# Altium PCB TriF3FCPDB.PcbDoc (part 2 of 2)
Units mm, origin at the board's own origin, x right, y up, seen from the top; angles counter-clockwise.
Board outline 130.11 x 100.1 mm, 2 copper layers (Top Layer, Bottom Layer); 86 components, 62 nets, 310 pads, 526 vias.
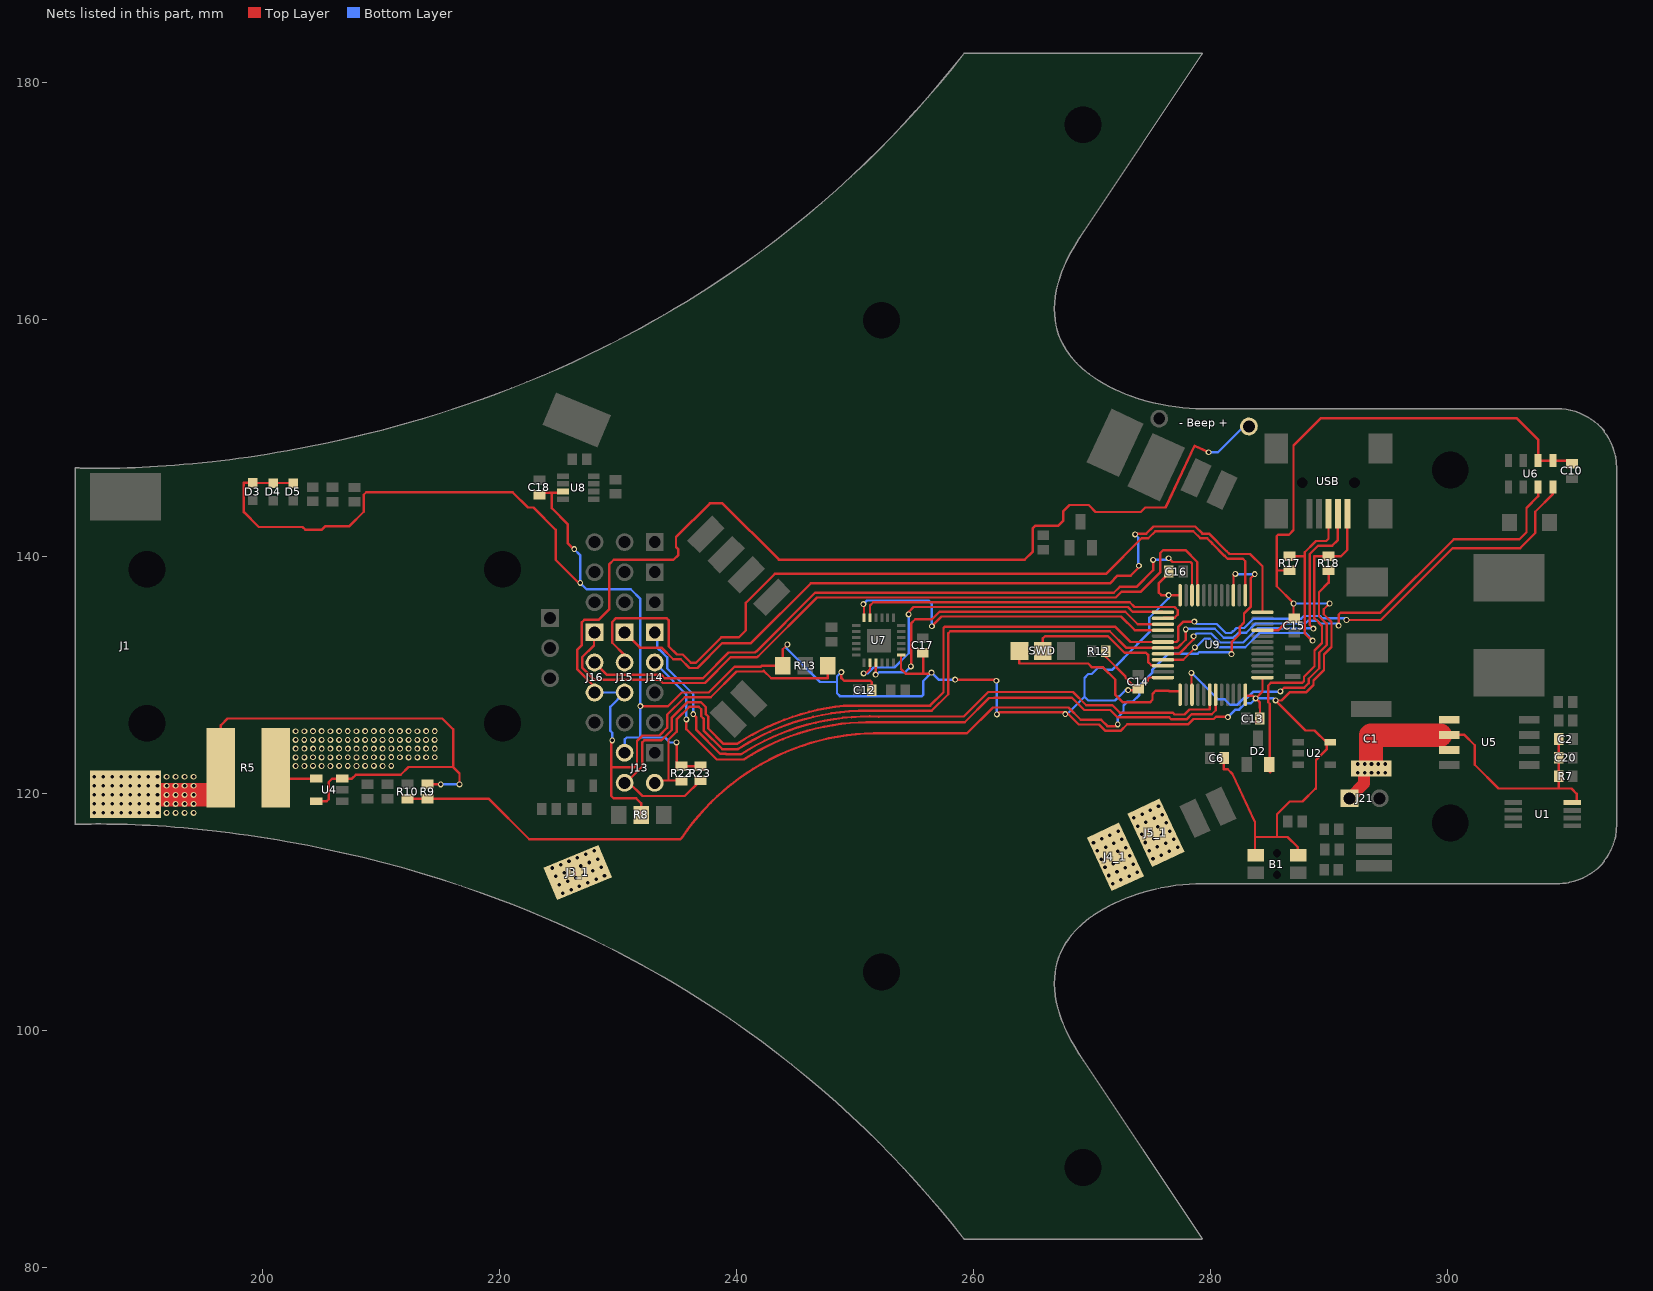
[diagram p2: the nets of this part, all layers, seen from the top]

## Via types
v1: diameter 0.5, hole 0.3, Top Layer to Bottom Layer, tented both sides, 526 vias

## Nets (pads, with @x,y where several pads share a name; then routed paths per layer and width w, separated by ;. In a path a pad name is that pad's centre, name@x,y a point inside that pad or via, vN(x,y) a via of type N, cw(c..) or ccw(c..) an arc to the next point about the centre after c; other vN are vias at no path point) (continued)
SCLK/PA9: J13.4 R23.2 U6.8 U9.30 | length 108.4
  Top Layer w0.2: J13.4@230.561,120.905 230.681,120.905 232.051,122.275 232.051,124.319 232.227,124.495 233.662,124.495 234.551,125.384 234.551,126.413 235.856,127.718 236.987,127.718 237.421,127.284 237.421,126.696 237.624,126.493 237.624,125.49 238.919,124.195 240.051,124.195 ; J13.4@230.871,120.982 232.061,119.792 235.634,119.792 235.637,119.789 R23.2@236.958,121.11 ; 240.051,124.201 cw(c251.247,107.067) 249.076,127.419 ; 249.036,127.423 256.345,127.423 257.474,128.552 257.474,133.979 257.586,134.091 271.944,134.091 273.244,132.791 U9.30@275.995,132.791 277.147,132.791 277.277,132.922 277.277,134.061 277.724,134.508 v1(278.651,134.508) ; v1@291.424,134.686 v1@291.486,134.748 ; v1@291.493,134.755 v1@291.486,134.748 ; U6.8@308.906,145.891 308.906,145.278 307.417,143.789 307.417,141.985 306.146,140.714 300.449,140.714 294.382,134.647 v1(291.486,134.647) v1@291.486,134.748
  Bottom Layer w0.2: v1(278.651,134.508) 278.849,134.309 280.536,134.309 281.293,133.552 281.749,133.552 281.899,133.702 281.941,133.702 282.209,133.97 282.861,133.97 283.639,134.748 287.652,134.748 287.889,134.986 289.238,134.986 289.443,134.78 291.353,134.78 v1(291.486,134.647)
SDA/PA10: J13.3 R22.1 U6.7 U9.31 | length 100
  Top Layer w0.2: J13.3@233.469,120.905 J13.3@233.101,120.905 233.295,121.099 234.303,121.099 ; R22.1@235.362,121.099 234.303,121.099 ; 240.133,123.749 cw(c251.062,106.999) 251.844,126.983 256.471,126.983 257.874,128.386 257.874,133.521 258.044,133.691 271.51,133.691 272.91,132.291 U9.31@275.995,132.291 277.234,132.291 277.92,132.978 v1(277.92,133.854) ; 240.149,123.768 240.131,123.751 238.798,123.751 237.224,125.324 237.224,126.327 237.021,126.53 237.021,127.112 236.815,127.318 236.021,127.318 234.951,126.247 234.951,125.219 234.268,124.535 234.268,121.135 234.303,121.099 ; v1(290.823,134.179) 290.823,135.092 291.003,135.272 294.352,135.272 300.533,141.453 306.069,141.453 306.676,142.06 306.676,144.11 307.656,145.09 U6.7@307.656,145.891
  Bottom Layer w0.2: v1(277.92,133.854) 277.976,133.909 280.371,133.909 281.127,133.152 281.914,133.152 282.064,133.302 282.106,133.302 282.374,133.57 283.027,133.57 283.805,134.348 288.002,134.348 288.239,134.586 289.031,134.586 289.269,134.348 290.654,134.348 v1(290.823,134.179)
SPI2_MISO/PB14: U7.9 U9.27 | length 30
  Top Layer w0.2: v1(251.751,130.034) 251.751,131.019 U7.9@251.765,131.033 ; v1@254.764,130.725 254.764,134.396 255.086,134.718 255.542,134.718 255.566,134.694 255.581,134.709 256.507,134.709 257.139,135.341 272.816,135.341 273.866,134.291 U9.27@275.995,134.291
  Bottom Layer w0.2: v1(251.751,130.034) 251.849,130.034 252.052,130.237 254.235,130.237 v1(254.723,130.725)
SPI2_MOSI/PB15: U7.24 U9.28 | length 29.1
  Top Layer w0.2: v1(250.708,135.991) 250.765,135.934 U7.24@250.765,134.833 ; 256.674,134.31 257.305,134.941 272.461,134.941 273.611,133.791 U9.28@275.995,133.791
  Bottom Layer w0.2: v1(250.708,135.991) 251.009,136.292 256.2,136.292 256.486,136.007 v1(256.486,134.123)
SPI2_NSS/PB12: U7.8 U9.25 | length 30.9
  Top Layer w0.2: v1@250.671,130.09 250.862,130.09 251.265,130.493 U7.8@251.265,131.033 ; v1@254.544,135.122 254.544,135.334 254.951,135.741 273.033,135.741 273.433,135.341 275.945,135.341 U9.25@275.995,135.291
  Bottom Layer w0.2: v1(250.735,130.136) 251.075,130.136 251.577,130.637 253.338,130.637 254.544,131.843 254.544,134.944 v1@254.549,134.948
  other v1: 254.534,135.122
SPI2_SCK/PB13: U7.23 U9.26 | length 29.2
  Top Layer w0.2: U7.23@251.265,134.833 251.265,135.862 251.544,136.141 273.199,136.141 273.599,135.741 276.981,135.741 277.245,135.477 277.245,135.105 276.981,134.841 276.045,134.841 U9.26@275.995,134.791
SWDCLK/PA14: SWD.1 U9.37 | length 17.5
  Top Layer w0.2: SWD.1@263.877,132.062 263.877,130.971 269.686,130.971 270.008,130.649 270.928,130.649 271.979,129.598 271.979,128.328 ; 272.025,128.281 271.979,128.328 ; U9.37@277.371,128.623 277.356,128.639 276.536,128.639 276.503,128.672 275.376,128.672 275.11,128.407 275.11,127.911 274.891,127.692 272.614,127.692 271.979,128.328
SWDIO/PA13: SWD.2 U9.34 | length 12.7
  Top Layer w0.2: SWD.2@265.842,132.037 265.842,133.073 266.048,133.279 271.356,133.279 272.744,131.891 274.556,131.891 274.745,131.702 274.745,131.105 275.009,130.841 275.945,130.841 U9.34@275.995,130.791 ; SWD.2@266.298,132.014 SWD.2@266.34,132.014
UART1_RX/SBUSINPUT/PB7: J14.2 U9.43 | length 57
  Top Layer w0.2: v1(235.767,126.257) 235.767,125.436 238.33,122.873 240.646,122.873 ; 240.675,122.898 cw(c251.157,106.854) 251.041,126.018 cw(c251.157,106.854) 251.157,126.018 259.262,126.018 261.309,128.065 262.03,128.065 262.053,128.088 ; 250.928,126.018 cw(c250.928,107.684) 251.272,126.015 ; 261.746,128.088 262.053,128.088 ; U9.43@280.445,128.341 280.445,127.025 280.111,126.691 278.403,126.691 277.974,126.261 276.688,126.261 276.522,126.427 272.981,126.427 272.182,126.427 272.175,126.427 271.553,127.049 269.359,127.049 268.32,128.088 262.053,128.088
  Bottom Layer w0.2: J14.2@233.101,131.065 234.683,129.483 234.668,129.468 235.767,128.369 v1(235.767,126.257)
UART1_TX/PB6: J14.1 U9.42 | length 57.7
  Top Layer w0.2: v1(236.351,126.701) 236.621,126.432 236.621,125.362 238.632,123.351 239.103,123.351 239.147,123.306 240.377,123.306 240.359,123.324 ; 240.373,123.313 cw(c251.223,106.513) 252.006,126.497 ; 252.006,126.503 259.181,126.503 261.249,128.571 268.402,128.571 269.525,127.449 271.726,127.449 272.348,126.827 276.821,126.827 276.975,126.674 277.819,126.674 278.236,127.091 279.945,127.091 U9.42@279.945,128.341 U9.42@279.895,128.291
  Bottom Layer w0.2: J14.1@233.101,133.605 233.33,133.376 233.33,132.287 233.502,132.115 233.536,132.115 234.151,131.5 234.151,130.581 236.351,128.38 v1(236.351,126.701)
UART2_RX/PA3: J15.2 U9.13 | length 70.3
  Top Layer w0.2: J15.2@230.718,131.065 J15.2@230.561,131.065 230.561,131.681 229.511,132.731 229.511,134.479 229.834,134.803 234.092,134.803 234.27,134.625 234.27,133.684 234.27,132.435 234.97,131.735 235.461,131.735 236.151,131.045 236.587,131.045 238.721,133.179 240.196,133.179 240.785,133.768 240.785,136.093 243.232,138.541 271.183,138.541 274.184,141.542 274.758,141.542 275.358,142.143 278.553,142.143 279.154,141.542 279.72,141.542 280.164,141.098 280.164,141.081 281.189,140.056 281.206,140.056 281.441,139.821 282.737,139.821 282.945,139.613 U9.13@282.945,136.741
UART2_TX/PA2: J15.1 U9.12 | length 67.4
  Top Layer w0.2: J15.1@230.561,133.605 230.561,133.599 231.845,132.314 233.68,132.314 234.66,131.335 235.295,131.335 236.034,130.596 236.704,130.596 238.808,132.7 241.226,132.7 246.267,137.741 271.514,137.741 272.169,138.396 273.275,138.396 v1@274.036,139.157 ; v1@273.64,141.942 274.592,141.942 275.193,142.543 278.719,142.543 279.32,141.942 279.885,141.942 280.564,141.264 280.564,141.247 281.355,140.456 281.372,140.456 281.607,140.221 283.354,140.221 ; 283.408,140.168 283.354,140.221 ; U9.12@284.395,135.291 284.395,139.18 283.354,140.221
  Bottom Layer w0.2: v1(273.64,141.867) 273.917,141.59 273.917,139.276 v1(273.967,139.226)
UART3_RX: J16.2 U9.22 | length 58.6
  Top Layer w0.2: J16.2@228.021,131.065 229.071,130.015 233.662,130.015 233.943,129.734 237.166,129.734 239.332,131.9 241.561,131.9 241.651,131.99 241.68,131.99 246.631,136.941 271.845,136.941 272.35,137.446 273.768,137.446 275.162,138.84 v1(275.162,139.725) ; v1(276.476,139.86) 276.798,139.538 278.33,139.538 278.445,139.423 U9.22@278.445,136.741
  Bottom Layer w0.2: v1(275.162,139.725) 276.341,139.725 v1(276.476,139.86)
UART3_TX: J16.1 U9.21 | length 64.7
  Top Layer w0.2: J16.1@228.021,133.605 227.98,133.564 227.98,132.508 226.971,131.5 226.971,130.63 227.986,129.615 233.496,129.615 233.777,129.334 237.332,129.334 239.497,131.5 241.726,131.5 241.817,131.59 241.845,131.59 246.796,136.541 272.011,136.541 272.516,137.046 274.146,137.046 275.756,138.656 275.756,140.278 276.021,140.543 277.891,140.543 278.895,139.539 278.895,136.791 U9.21@278.945,136.741
"USB PWR/PB3": R18.1 U9.39 | length 24.5
  Top Layer w0.2: v1(278.4,130.191) 278.4,128.386 U9.39@278.445,128.341 ; U9.39@278.45,128.336 U9.39@278.445,128.341 ; U9.39@278.495,128.391 U9.39@278.445,128.341 ; v1(285.908,128.625) 286.224,128.941 287.915,128.941 288.298,129.324 288.298,129.695 289.185,130.582 289.185,131.9 289.823,132.538 289.823,134.317 289.169,134.971 289.169,136.996 ; 289.17,136.996 289.975,137.802 R18.1@289.975,138.827
  Bottom Layer w0.2: v1(278.4,130.191) 280.632,127.959 281.2,127.959 281.673,127.486 282.253,127.486 282.829,128.062 283.074,128.062 283.594,128.583 285.866,128.583 v1(285.908,128.625)
"USB R N/PA11": U9.32 USB.2 | length 26.7
  Top Layer w0.2: U9.32@275.995,131.791 277.355,131.791 278.585,133.021 v1(278.585,133.276) ; v1(288.693,133.916) 288.369,134.24 288.369,140.193 289.09,140.914 290.268,140.914 290.761,141.407 USB.2@290.761,143.617 USB.2@290.761,144.617
  Bottom Layer w0.2: v1(278.585,133.276) 278.818,133.509 280.073,133.509 280.83,132.752 282.774,132.752 283.97,133.948 v1@288.539,133.948
"USB R P/PA12": R17.2 U9.33 USB.3 | length 29.1
  Top Layer w0.2: U9.33@275.995,131.291 277.701,131.291 v1@278.629,132.219 ; R17.2@286.68,140.027 287.924,140.027 287.969,140.072 ; v1(288.623,132.909) 288.578,132.909 287.969,133.518 287.969,140.072 ; USB.3@289.955,144.611 289.961,144.617 USB.3@289.961,143.617 289.961,141.504 289.771,141.314 288.91,141.314 288.785,141.189 287.969,140.373 287.969,140.072
  Bottom Layer w0.2: v1@278.629,132.219 278.665,132.219 279.514,133.068 279.949,133.068 280.664,132.352 282.94,132.352 284.136,133.548 288.013,133.548 v1@288.638,132.924
  other v1: 278.683,132.338
USB_PWR: D2.2 R18.2 USB.1 | length 29.1
  Top Layer w0.2: 285.054,121.798 285.009,121.842 285.009,127.57 284.877,127.702 284.877,129.119 285.099,129.341 287.749,129.341 287.898,129.49 287.898,129.861 288.785,130.748 288.785,132.066 289.423,132.704 289.423,134.151 288.769,134.805 288.769,140.017 ; 288.769,140.027 288.769,140.017 ; USB.1@291.571,144.607 291.561,144.617 USB.1@291.561,143.617 291.561,140.578 291.01,140.027 R18.2@289.975,140.027 288.779,140.027 288.769,140.017
USENSOR/PA5: R9.1 R10.2 U9.15 | length 90.8
  Top Layer w0.2: R10.2@212.238,119.573 213.932,119.573 219.084,119.573 222.515,116.142 233.118,116.142 233.126,116.134 235.251,116.134 235.398,116.281 cw(c251.981,105.101) 252.356,125.097 ; 251.981,125.097 259.446,125.097 259.459,125.084 261.64,127.265 268.012,127.265 269.05,126.226 270.774,126.226 271.304,125.696 271.76,125.696 ; 271.771,125.707 271.76,125.696 ; v1(272.179,125.838) 272.037,125.696 271.76,125.696 ; v1@281.812,131.761 281.812,132.808 282.485,133.482 282.485,134.076 282.833,134.424 282.833,135.193 283.395,135.755 283.395,138.171 v1(283.739,138.515) ; U9.15@281.945,136.741 v1@281.945,138.472
  Bottom Layer w0.2: v1(272.179,125.838) 272.179,126.426 272.667,126.913 272.667,127.436 273.004,127.773 273.451,127.773 274.008,128.329 274.008,129.122 275.099,130.214 275.099,130.466 276.422,131.788 278.911,131.788 279.044,131.921 281.739,131.921 v1@281.801,131.859 ; v1(282.1,138.538) 282.123,138.515 v1(283.739,138.515)
  other v1: 281.779,131.761
VBAT+: J1.1 R5.1 R9.2 U4.3 U4.5 | length 51.2
  Top Layer w0.2: R5.1@196.483,122.192 196.483,125.769 197.05,126.335 215.176,126.335 216.087,125.424 216.087,122.236 ; U4.5@204.521,119.362 205.425,119.362 205.589,119.526 205.589,120.966 205.885,121.262 U4.3@206.721,121.262 207.553,121.262 207.878,121.587 211.66,121.587 212.31,122.236 216.087,122.236 ; R9.2@213.933,120.773 213.938,120.777 v1(215.046,120.777) ; v1(216.624,120.777) 216.624,121.699 216.087,122.236
  Top Layer w2: J1.1@189.953,119.89 R5.1@196.222,119.89
  Bottom Layer w0.2: v1(215.046,120.777) v1(216.624,120.777)
  other v1: 185.787,118.365 186.551,118.365 187.315,118.365 188.079,118.365 188.843,118.365 189.607,118.365 190.371,118.365 191.135,118.365 191.899,118.365 192.663,118.365 193.427,118.365 194.191,118.365 185.787,119.129 186.551,119.129 187.315,119.129 188.079,119.129 188.843,119.129 189.607,119.129 190.371,119.129 191.135,119.129 191.899,119.129 192.663,119.129 193.427,119.129 194.191,119.129 185.787,119.893 186.551,119.893 187.315,119.893 188.079,119.893 188.843,119.893 189.607,119.893 190.371,119.893 191.135,119.893 191.899,119.893 192.663,119.893 193.427,119.893 194.191,119.893 185.787,120.657 186.551,120.657 187.315,120.657 188.079,120.657 188.843,120.657 189.607,120.657 190.371,120.657 191.135,120.657 191.899,120.657 192.663,120.657 193.427,120.657 194.191,120.657 185.787,121.421 186.551,121.421 187.315,121.421 188.079,121.421 188.843,121.421 189.607,121.421 190.371,121.421 191.135,121.421 191.899,121.421 192.663,121.421 193.427,121.421 194.191,121.421
VCC_3.3: B1.1 B1.4 C6.2 C10.2 C12.2 C13.2 C14.2 C15.2 C16.2 C17.2 C18.2 D3.1 D4.1 D5.1 J13.2 R12.2 R13.1 R17.1 R22.2 R23.1 U2.5 U6.1 U6.2 U7.13 U8.3 U9.1 U9.9 U9.24 U9.36 U9.48 | length 285.8
  Top Layer w0.2: D5.1@202.594,146.208 D4.1@200.895,146.208 199.229,146.208 D3.1@199.195,146.242 198.426,146.242 198.426,143.75 199.679,142.498 203.388,142.498 203.609,142.276 205.017,142.276 205.313,142.572 207.337,142.572 208.549,143.783 208.549,145.218 208.761,145.43 221.107,145.43 222.399,144.138 222.862,144.138 224.733,142.268 224.733,139.734 226.688,137.779 v1(226.818,137.779) ; C18.2@223.365,145.238 223.506,145.379 224.422,145.379 ; U8.3@225.362,145.489 225.252,145.379 224.422,145.379 ; v1@226.295,140.61 225.751,141.155 225.751,142.743 224.422,144.072 224.422,145.379 ; J13.2@230.561,123.445 J13.2@230.561,124.095 ; v1(231.888,127.375) 234.21,127.375 234.216,127.369 235.381,128.534 237.663,128.534 239.829,130.7 242.058,130.7 242.148,130.79 242.592,130.79 ; R22.2@234.966,122.031 v1@234.966,124.3 ; R22.2@235.362,122.299 236.947,122.299 R23.1@236.958,122.31 ; 242.615,130.767 242.592,130.79 ; v1@244.307,132.576 243.907,132.176 R13.1@243.907,130.79 242.592,130.79 ; v1(248.855,130.25) 248.855,129.742 249.078,129.52 251.304,129.52 251.432,129.392 C12.2@251.432,128.714 ; U7.13@253.915,131.683 253.888,131.656 253.888,130.525 254.295,130.118 255.757,130.118 ; C17.2@255.755,131.945 255.755,130.12 255.757,130.118 ; v1@256.373,130.118 255.757,130.118 ; v1(258.448,129.615) 261.844,129.615 v1(261.937,129.522) ; v1(261.981,126.689) 262.157,126.865 267.846,126.865 268.885,125.826 270.608,125.826 271.146,125.288 272.407,125.288 272.974,125.855 275.521,125.855 ; R12.2@271.165,131.543 272.829,129.879 272.829,129.771 273.768,128.832 C14.2@273.91,128.832 ; R12.2@271.181,131.89 R12.2@271.181,132.015 ; v1@273.085,128.715 C14.2@273.825,128.715 ; C14.2@273.693,129.049 C14.2@273.91,128.832 ; C14.2@273.877,128.799 C14.2@273.91,128.832 ; 275.624,125.855 275.521,125.855 ; U9.36@275.995,129.791 274.831,129.791 274.71,129.67 274.71,129.508 274.534,129.332 274.372,129.332 274.31,129.27 274.31,129.108 274.034,128.832 C14.2@273.91,128.832 ; C16.2@276.503,138.738 276.503,138.614 275.655,137.765 275.655,136.949 275.859,136.745 v1(276.476,136.745) 277.441,136.745 U9.24@277.445,136.741 ; C6.2@281.129,123.325 281.129,122.057 281.464,122.057 281.862,121.659 283.761,117.586 283.761,114.834 B1.1@283.817,114.778 ; v1(281.475,126.454) 281.441,126.488 280.473,126.488 280.276,126.291 278.581,126.291 278.151,125.861 275.527,125.861 275.521,125.855 ; U9.48@282.945,128.341 283.026,128.26 283.595,128.26 v1(283.822,128.033) ; 283.761,116.362 283.788,116.335 286.517,116.335 287.385,115.466 287.385,114.81 B1.4@287.417,114.778 ; C13.2@284.19,126.707 284.177,127.678 v1(283.822,128.033) ; U9.1@284.395,129.791 284.395,128.605 v1(283.822,128.033) ; U9.9@284.395,133.791 285.746,133.791 286.475,134.521 287,134.521 287.17,134.691 C15.2@287.259,134.78 ; 285.624,116.363 285.624,118.256 286.702,119.334 287.772,119.334 288.848,120.41 288.914,120.41 288.914,122.836 289.83,123.752 289.83,124.29 288.796,125.324 ; R17.1@286.68,138.827 285.65,138.827 285.595,138.772 ; C15.2@287.079,134.782 287.011,134.85 287.011,136.079 285.595,137.495 285.595,138.772 ; 288.95,125.179 288.804,125.324 288.796,125.324 ; v1(290.059,136.038) 289.569,135.548 289.569,135.138 290.223,134.484 290.223,132.373 289.585,131.735 289.585,130.416 288.698,129.529 288.698,129.159 288.08,128.541 286.677,128.541 285.995,127.859 v1(285.498,127.859) 288.033,125.324 288.796,125.324 ; C10.2@310.503,147.829 310.241,148.091 U6.1@308.906,148.091 U6.2@307.656,148.091 307.656,149.885 305.874,151.667 289.293,151.667 287.011,149.385 287.011,142.234 286.625,141.848 285.709,141.848 285.595,141.733 285.595,138.772
  Bottom Layer w0.2: v1(226.309,140.623) 226.803,140.129 226.803,137.782 227.343,137.242 231.071,137.242 231.888,136.424 v1(231.888,127.375) 231.888,124.786 ; J13.2@230.561,123.445 230.561,124.551 230.741,124.73 233.958,124.73 234.376,124.313 v1(234.941,124.313) ; v1@244.307,132.576 244.196,132.465 244.196,132.28 247.056,129.419 248.484,129.419 ; v1(248.855,130.25) 248.839,130.25 248.484,129.895 248.484,129.419 ; v1(258.448,129.615) 257.052,129.615 v1(256.461,130.206) 255.758,129.503 255.758,128.92 255.756,128.918 255.756,128.331 255.646,128.221 248.728,128.221 248.484,128.465 248.484,129.419 ; v1(261.937,129.522) 261.981,129.478 v1(261.981,126.689) ; v1(267.749,126.7) 267.897,126.7 269.368,128.171 ; v1(273.058,128.723) 272.822,128.723 271.949,127.849 269.69,127.849 269.368,128.171 ; v1(276.476,136.745) 276.476,136.484 274.831,134.839 274.831,133.86 274.872,133.819 274.872,133.632 272.7,131.46 272.7,131.428 271.733,130.462 271.115,130.462 270.965,130.612 270.509,130.612 269.988,130.091 269.695,130.091 269.368,129.764 269.368,128.171 ; v1(281.475,126.454) 282.108,127.086 282.419,127.086 282.954,127.622 283.412,127.622 v1(283.822,128.033) ; v1@283.864,128.075 v1(283.822,128.033) ; v1(285.498,127.859) 285.324,128.033 v1(283.822,128.033) ; v1@286.986,136.002 v1(287.023,136.038) v1(290.059,136.038)
  other v1: 244.301,132.581
VCC_5: "- Beep +.1" J15.3 J16.3 R8.2 R13.3 | length 121.3
  Top Layer w0.2: J16.3@228.021,128.525 228.021,129.014 226.571,130.464 226.571,132.152 226.952,132.533 226.952,134.46 227.147,134.655 228.358,134.655 229.272,135.569 229.272,139.361 229.646,139.735 234.688,139.735 235.098,140.145 235.098,140.601 234.902,140.796 234.902,141.641 237.755,144.493 238.826,144.493 243.578,139.741 264.334,139.741 264.99,140.397 264.99,142.37 265.232,142.612 267.18,142.612 267.567,142.998 267.567,143.801 268.115,144.349 269.732,144.349 270.315,143.766 274.12,143.766 274.497,144.143 276.235,144.143 ; 229.419,122.229 229.419,124.391 v1(229.515,124.486) ; R8.2@231.95,118.199 231.95,119.188 231.528,119.61 229.63,119.61 229.423,119.817 229.423,122.225 231.364,122.225 231.611,122.472 231.611,124.445 232.061,124.895 233.496,124.895 234.151,125.55 234.151,126.648 235.637,128.134 237.829,128.134 239.995,130.3 242.224,130.3 242.294,130.37 242.93,129.734 247.707,129.734 R13.3@247.707,130.79 ; 276.235,144.158 278.662,149.361 v1(279.855,148.805)
  Bottom Layer w0.2: J16.3@228.021,128.525 J15.3@230.561,128.525 229.36,127.324 229.36,125.28 229.515,125.126 v1(229.515,124.486) ; v1(279.855,148.805) 280.634,148.805 283.245,151.416
VIN: C1.1 C2.2 C20.2 J3_1.1 J4_1.1 J5_1.1 J21.1 R5.2 R7.2 U1.8 U4.4 U5.1 U5.2 U5.3 | length 34
  Top Layer w0.2: R5.2@201.133,122.192 202.063,121.262 U4.4@204.521,121.262 ; U5.2@300.167,124.95 301.447,124.95 302.314,124.083 302.314,122.434 304.321,120.426 309.42,120.426 ; C2.2@309.402,124.592 309.394,124.583 R7.2@309.394,121.463 309.394,120.452 309.42,120.426 ; U1.8@310.917,119.243 310.917,119.972 310.462,120.426 309.42,120.426
  Top Layer w0.5: J21.1@291.745,119.596 J21.1@291.745,119.621 ; C1.1@292.974,121.525 C1.1@293.584,122.135
  Top Layer w1: J21.1@291.745,119.621 292.974,120.85 C1.1@292.974,121.525
  Top Layer w2: C1.1@293.551,122.497 293.551,124.917 U5.2@299.403,124.911
  other v1: 225.333,111.598 226.039,111.89 226.745,112.183 225.041,112.304 271.749,112.391 227.45,112.475 225.746,112.596 272.441,112.714 228.156,112.768 226.452,112.889 224.748,113.01 273.133,113.036 228.862,113.06 271.426,113.083 227.158,113.181 225.454,113.302 273.826,113.359 272.118,113.406 227.864,113.473 226.16,113.595 224.456,113.716 272.811,113.729 228.57,113.766 271.103,113.776 226.866,113.887 225.162,114.008 273.503,114.052 271.795,114.098 227.572,114.179 225.867,114.3 272.488,114.421 228.277,114.472 270.78,114.468 275.155,114.484 226.573,114.593 273.18,114.744 271.472,114.791 275.848,114.806 227.279,114.885 272.165,115.114 276.54,115.129 270.457,115.16 274.832,115.176 227.985,115.177 272.857,115.437 277.233,115.452 271.15,115.483 275.525,115.499 271.842,115.806 276.217,115.822 270.134,115.853 274.51,115.868 272.534,116.129 276.91,116.145 270.827,116.176 275.202,116.191 271.519,116.499 275.894,116.514 274.187,116.561 272.211,116.821 276.587,116.837 274.879,116.884 275.572,117.207 273.864,117.253 276.264,117.529 274.556,117.576 275.249,117.899 273.541,117.946 275.941,118.222 274.233,118.269 274.926,118.591 275.618,118.914 292.43,121.757 293.012,121.757 293.594,121.757 294.176,121.757 294.758,121.757 202.793,122.326 203.527,122.323 204.261,122.33 204.995,122.327 205.729,122.324 206.462,122.331 207.196,122.328 207.93,122.326 208.664,122.332 209.398,122.329 210.132,122.327 210.866,122.333 292.43,122.497 293.012,122.497 293.594,122.497 294.176,122.497 294.758,122.497 202.793,123.06 203.527,123.057 204.261,123.064 204.995,123.061 205.729,123.058 206.462,123.065 207.196,123.062 207.93,123.059 208.664,123.066 209.398,123.063 210.132,123.061 210.866,123.067 211.6,123.064 212.333,123.061 213.067,123.058 213.801,123.065 214.535,123.062 202.796,123.793 203.53,123.791 204.264,123.798 204.998,123.795 205.732,123.792 206.466,123.799 207.2,123.796 207.934,123.793 208.667,123.8 209.401,123.797 210.135,123.794 210.869,123.801 211.603,123.798 212.337,123.794 213.071,123.792 213.805,123.799 214.538,123.796 202.79,124.527 203.524,124.525 204.257,124.532 204.991,124.528 205.725,124.526 206.459,124.533 207.193,124.53 207.927,124.527 208.661,124.534 209.395,124.531 210.128,124.528 210.862,124.535 211.596,124.532 212.33,124.528 213.064,124.526 213.798,124.533 214.532,124.529 203.526,125.259 205.727,125.26 213.066,125.26 202.792,125.261 204.26,125.266 204.994,125.262 206.461,125.267 207.195,125.263 207.929,125.261 208.663,125.268 209.397,125.264 210.131,125.262 210.865,125.269 211.598,125.266 212.332,125.262 213.8,125.267 214.534,125.263
pads on no net: B1.5 B1.6 J20.1 J20.2 J20.3 U1.3 U2.2 U3.4 U6.5 U6.6 U7.2 U7.3 U7.4 U7.5 U7.6 U7.7 U7.11 U7.14 U7.15 U7.16 U7.17 U7.18 U7.19 U7.21 U7.22 U8.5 U9.2 U9.3 U9.4 USB.4 USB.10 USB.11

## Polygon pours and split planes (outlines as drawn)
no net on Keep-Out Layer "Top Layer-No Net" (solid, pour order 6): 248.434,93.942 248.435,93.942 249.677,92.809 250.911,91.639 251.981,90.586 253.043,89.505 253.043,89.506 253.043,89.505 254.096,88.396 254.096,88.395 254.096,88.396 254.095,88.396 254.096,88.396 255.139,87.257 256.172,86.089 256.172,86.09 256.172,86.089 257.195,84.892 257.194,84.892 257.195,84.892 258.206,83.665 259.206,82.407 ccw(c259.245,82.438) 259.245,82.388 279.245,82.388 ccw(c279.245,82.439) 279.296,82.439 ccw(c279.245,82.439) 279.287,82.467 ccw(c279.245,82.439) 279.287,82.467 269.287,97.467 268.893,98.066 268.893,98.065 268.893,98.066 268.537,98.649 268.537,98.648 268.537,98.649 268.536,98.65 268.537,98.649 268.217,99.219 268.218,99.218 268.217,99.219 267.933,99.774 267.684,100.315 267.685,100.314 267.684,100.315 267.684,100.316 267.684,100.315 267.469,100.841 267.287,101.354 267.136,101.853 267.002,102.406 266.907,102.942 266.85,103.46 266.828,103.961 266.842,104.445 266.889,104.913 266.968,105.363 267.077,105.798 267.215,106.217 267.346,106.54 267.494,106.854 267.658,107.158 267.838,107.452 268.033,107.736 268.241,108.011 268.7,108.533 269.206,109.018 269.756,109.467 270.161,109.758 270.581,110.033 271.016,110.291 271.416,110.507 ccw(c271.404,110.556) 271.438,110.519 271.463,110.533 271.922,110.758 ccw(c271.899,110.803) 271.95,110.803 ccw(c271.899,110.803) 271.877,110.849 271.418,110.622 ccw(c271.44,110.577) 271.416,110.622 271.39,110.607 ccw(c264.611,10.452) 232.307,105.497 232.296,105.503 ccw(c232.271,105.459) 232.221,105.458 ccw(c232.261,105.428) 232.278,105.38 cw(c264.614,10.459) 232.297,105.387 232.933,105.027 232.934,105.027 232.933,105.027 233.878,104.488 233.877,104.488 233.878,104.488 234.821,103.934 234.822,103.933 234.821,103.934 235.765,103.363 235.765,103.364 235.765,103.363 236.707,102.778 236.708,102.777 236.707,102.778 237.65,102.176 238.59,101.558 239.53,100.924 239.529,100.924 239.53,100.924 240.818,100.025 242.103,99.094 242.102,99.094 242.103,99.094 243.382,98.131 243.383,98.13 243.382,98.131 244.656,97.134 245.923,96.104 245.922,96.105 245.923,96.104 247.183,95.041 247.183,95.04 247.183,95.041 247.182,95.041 247.183,95.041 248.435,93.942
no net on Keep-Out Layer "Top Layer-No Net" (solid, pour order 8): 232.232,159.361 cw(c232.249,159.409) 232.211,159.442 cw(c232.261,159.449) 232.238,159.493 232.934,159.851 233.878,160.39 234.821,160.944 234.822,160.944 234.821,160.944 235.765,161.514 236.708,162.099 237.65,162.701 238.59,163.319 239.53,163.953 240.818,164.852 242.103,165.783 242.103,165.784 242.103,165.783 243.382,166.746 244.656,167.743 245.923,168.773 247.183,169.836 248.435,170.935 249.677,172.068 249.678,172.069 249.677,172.068 250.911,173.238 251.981,174.291 253.043,175.372 254.096,176.481 255.139,177.619 256.172,178.787 257.195,179.984 257.195,179.985 257.195,179.984 258.206,181.212 259.206,182.469 cw(c259.245,182.438) 259.245,182.488 279.245,182.488 cw(c279.245,182.438) 279.296,182.438 cw(c279.245,182.438) 279.287,182.41 cw(c279.245,182.438) 279.287,182.41 269.287,167.41 269.288,167.41 269.287,167.41 268.893,166.811 268.893,166.812 268.893,166.811 268.537,166.228 268.536,166.227 268.537,166.228 268.217,165.658 268.218,165.659 268.217,165.658 267.933,165.104 267.933,165.105 267.933,165.104 267.933,165.103 267.933,165.104 267.684,164.563 267.685,164.564 267.684,164.563 267.469,164.036 267.287,163.523 267.136,163.025 267.002,162.471 266.907,161.936 266.85,161.417 266.828,160.916 266.842,160.432 266.889,159.965 266.968,159.514 267.077,159.079 267.215,158.661 267.346,158.337 267.494,158.024 267.658,157.72 267.838,157.426 268.033,157.141 268.241,156.867 268.7,156.345 269.206,155.86 269.756,155.411 270.161,155.119 270.973,154.59 cw(c270.991,154.543) 271.015,154.588 271.464,154.345 cw(c271.44,154.301) 271.491,154.301 cw(c271.44,154.301) 271.432,154.251 cw(c271.391,154.281) 271.394,154.231 cw(c264.598,254.384)
VIN on Bottom Layer "Top Layer-No Net" (solid, pour order 9): 240.847,100.066 242.133,99.134 243.413,98.171 244.687,97.174 245.955,96.143 247.215,95.079 248.468,93.98 249.712,92.845 250.946,91.675 252.017,90.622 253.079,89.54 254.133,88.43 255.177,87.291 256.21,86.123 257.233,84.924 258.245,83.696 259.245,82.438 279.245,82.439 269.246,97.439 268.85,98.039 268.493,98.624 268.173,99.195 267.888,99.752 267.638,100.295 267.422,100.823 267.239,101.338 267.088,101.84 266.953,102.396 266.857,102.935 266.799,103.457 266.778,103.961 266.792,104.449 266.839,104.919 266.918,105.374 267.028,105.812 267.168,106.234 267.3,106.561 267.449,106.877 267.614,107.183 267.796,107.479 267.992,107.766 268.202,108.043 268.663,108.568 269.173,109.056 269.725,109.507 270.132,109.8 270.555,110.076 270.991,110.335 271.44,110.577 271.899,110.803 272.367,111.014 272.841,111.208 273.319,111.388 273.801,111.552 274.47,111.756 275.136,111.931 275.792,112.079 276.434,112.201 277.057,112.297 277.654,112.368 278.222,112.415 278.754,112.438 296.923,112.438 296.923,123.073 291.304,123.073 290.645,122.415 290.645,122.407 222.172,122.407 216.749,127.829 198.02,127.829 198.02,116.635 198.805,116.525 199.606,116.407 200.423,116.28 201.254,116.143 202.101,115.996 203.838,115.673 cw(c186.049,23.45) 213.403,113.302 213.404,113.306 215.125,112.777 216.795,112.247 218.533,111.643 219.793,111.182 221.062,110.697 222.34,110.188 223.625,109.655 224.916,109.096 226.213,108.512 227.514,107.902 228.82,107.265 230.129,106.6 232.271,105.459 232.958,105.071 233.903,104.532 234.847,103.977 235.791,103.406 236.734,102.82 237.677,102.218 238.618,101.6 239.558,100.966
GND on Bottom Layer "Top Layer-No Net1" (solid, remove dead copper, pour order 12): 805 vertices, not listed, extent 184.187,82.388 314.298,182.488

## Keep-outs
Bottom Layer:
  circle w4: c252.273,159.938 r1.75
  circle w4: c252.274,104.938 r1.75
  circle w4: c300.258,147.317 r1.75
  circle w4: c300.258,117.394 r1.75
  circle w4: c220.274,125.938 r1.75
  circle w4: c190.274,138.938 r1.75
  circle w4: c190.274,125.938 r1.75
  circle w4: c220.274,138.938 r1.75
  circle w4: c252.274,159.938 r1.75
  circle w4: c269.274,176.438 r1.75
  circle w4: c300.273,147.438 r1.75
  circle w4: c300.273,117.515 r1.75
  circle w4: c252.274,104.938 r1.75
  circle w4: c269.274,88.438 r1.75
Keep-Out Layer:
  lines w0.1: 198.715,116.637 198.715,127.902 198.821,128.009 ; 198.715,127.829 216.749,127.829 222.172,122.407 ; 198.821,128.001 216.789,128.001 222.244,122.547 290.58,122.547 291.273,123.24 296.976,123.24 297.083,123.133 297.083,112.401 ; 198.862,116.555 198.862,127.82 ; 222.17,122.407 290.645,122.407 ; 290.645,122.415 291.303,123.074 296.923,123.073 296.923,112.438

## Other copper
Top Layer:
  rectangle net NetD1_1: 306.036,122.544 307.781,129.292
  rectangle net VIN: 299.294,123.54 301.045,126.462
  rectangle net VIN: 201.98,121.982 211.545,125.546
  rectangle net VIN: 209.348,122.588 215.298,125.535
  rectangle net VBAT+: 191.363,117.959 195.408,121.979
  rectangle net GND: 191.179,143.014 194.822,147.041
Bottom Layer:
  rectangle net VBAT+: 185.387,117.797 194.54,121.937

## Silkscreen, mask and mechanical layers (free items; w line width, h text height)
Top Overlay:
  circle w0.1: c240.372,143.424 r0.903
  circle w0.1: c241.881,141.935 r0.903
  circle w0.1: c243.272,140.563 r0.903
  circle w0.1: c273.633,144.026 r0.903
  circle w0.1: c270.197,146.057 r0.903
  circle w0.1: c270.236,118.612 r0.903
  circle w0.1: c273.635,120.49 r0.903
  circle w0.1: c185.634,141.449 r0.903
  circle w0.1: c185.634,123.34 r0.903
  circle w0.1: c241.67,123.935 r0.903
  circle w0.1: c243.377,125.371 r0.903
  circle w0.1: c225.61,128.511 r0.903
  circle w0.1: c225.581,126.008 r0.903
  circle w0.1: c281.782,115.65 r0.903
  circle w0.1: c279.78,114.705 r0.903
  circle w0.1: c280.13,149.397 r0.903
  circle w0.1: c282.141,148.47 r0.903
  circle w0.1: c227.846,110.393 r0.903
  circle w0.1: c227.742,154.563 r0.903
  lines w0.1: 185.044,123.349 186.212,123.349 ; 185.044,141.458 186.212,141.458 ; 185.622,122.752 185.622,123.92 ; 225.02,128.52 226.188,128.52 ; 225.026,125.964 226.194,125.964 ; 225.598,127.922 225.598,129.091 ; 227.152,154.572 228.32,154.572 ; 227.255,110.402 228.424,110.402 ; 227.834,109.804 227.834,110.973 ; 239.735,143.648 239.977,143.406 240.507,143.936 240.866,143.576 240.345,143.056 ; 240.337,143.047 240.579,142.804 ; 241.445,123.298 241.688,123.54 241.158,124.07 241.517,124.429 242.038,123.908 ; 241.457,141.524 242.283,142.35 ; 241.463,142.337 242.289,141.51 ; 242.047,123.899 242.29,124.142 ; 242.886,140.985 243.712,140.159 ; 242.955,124.985 243.781,125.811 ; 269.606,146.066 270.775,146.066 ; 269.645,118.621 270.814,118.621 ; 270.224,118.023 270.224,119.192 ; 273.042,144.035 274.211,144.035 ; 273.044,120.499 274.213,120.499 ; 273.623,119.901 273.623,121.07 ; 279.272,114.475 280.331,114.968 ; 279.627,149.638 280.686,149.144 ; 281.376,115.138 281.687,115.283 ; 281.488,148.453 281.799,148.308 ; 281.682,115.295 281.371,115.962 281.831,116.177 282.148,115.498 282.458,115.643 ; 281.804,148.319 282.116,148.987 282.576,148.772 282.259,148.093 282.57,147.948 ; 284.498,116.146 284.752,115.892 ; 284.76,115.939 284.76,115.903 284.76,117.024 ; 284.77,115.901 285.024,116.155
  lines w0.2: 226.898,134.842 226.898,124.772 226.924,124.798 229.3,124.798 ; 226.955,137.454 234.205,137.454 ; 229.274,134.842 229.274,124.772 ; 229.316,139.821 229.316,142.571 226.945,142.571 226.899,142.525 226.899,139.818 ; 229.316,142.568 234.205,142.568 234.214,142.559 234.214,139.792 ; 231.853,124.788 231.853,134.842 ; 234.155,134.844 226.904,134.844 226.899,134.849 226.899,139.818 ; 226.899,139.818 234.24,139.818 234.214,139.792 ; 229.274,124.772 229.274,119.885 229.339,119.82 234.21,119.82 234.214,119.816 234.214,124.798 ; 229.274,124.772 229.3,124.798 ; 229.3,124.798 234.214,124.798 ; 234.214,124.798 234.214,139.792
  text "Right ESC" at 276.035,144.199 h0.7 r335
  text "CAN" at 230.806,143.888 h0.7
  text "L" at 230.337,142.917 h0.7
  text "H" at 232.902,142.917 h0.7
  text "LED" at 226.882,142.859 h0.7
  text "PWM6" at 234.469,137.888 h0.7
  text "Servo" at 237.359,137.694 h0.7 r315
  text "/PPM" at 234.481,136.968 h0.7
  text "PWM5" at 234.507,135.475 h0.7
  text "Feedback" at 243.303,133.727 h0.7 r45
  text "TX" at 226.12,132.967 h0.7 r90
  text "UART2" at 222.75,130.575 h0.7 r90
  text "RX" at 226.12,130.588 h0.7 r90
  text "UART3" at 221.777,130.543 h0.7 r90
  text "CLK" at 263.385,130.264 h0.7 r270
  text "DIO" at 265.45,130.264 h0.7 r270
  text "NRST" at 267.452,130.264 h0.7 r270
  text "UART1" at 236.531,129.536 h0.7 r90
  text "3.3V 5V" at 242.913,128.633 h0.7
  text "SERIAL RX/" at 235.428,127.622 h0.7 r90
  text "Back ESC" at 236.737,127.436 h0.7 r45
  text "UART1-V" at 243.742,127.414 h0.7
  text "I2C" at 235.3,123.143 h0.7
  text "BUTTON" at 283.375,119.825 h0.7 r270
  text "BOOT" at 284.407,119.825 h0.7 r270
  text "Left ESC" at 276.382,119.41 h0.7 r25
  text "6V" at 296.037,116.465 h0.7
  text "5V" at 230.239,115.799 h0.7
  text "BEC" at 232.329,115.799 h0.7
  text "Rev2" at 306.589,114.06 h0.7
  text "8V" at 296.07,113.534 h0.7
  text "BEC-V" at 296.088,112.58 h0.7
Bottom Overlay:
  circle w0.1: c225.639,128.526 r0.903
  circle w0.1: c225.59,125.994 r0.903
  lines w0.1: 225.018,126.019 226.187,126.019 ; 225.059,128.514 226.228,128.514 ; 225.63,127.936 225.63,129.104 ; 295.417,120.625 295.417,118.527 290.78,118.527 290.78,120.585 290.842,120.647 295.417,120.647
  lines w0.2: 226.889,137.462 234.159,137.462 234.185,137.436 ; 226.892,124.723 234.196,124.723 ; 226.892,134.863 226.892,139.792 ; 226.897,124.733 226.892,124.738 226.892,134.848 234.196,134.848 ; 229.312,142.538 229.312,139.852 229.298,139.837 226.936,139.837 ; 229.33,134.815 229.33,124.733 229.33,119.903 229.419,119.813 234.156,119.813 ; 231.843,124.733 231.843,134.792 ; 234.156,119.932 234.156,119.813 ; 234.185,129.827 234.211,129.853 ; 234.211,139.815 226.958,139.815 226.936,139.837 ; 226.892,139.792 226.936,139.837 ; 226.892,139.792 226.892,142.505 226.986,142.599 229.374,142.599 234.196,142.599 234.196,124.723 ; 234.156,119.813 234.196,119.853 234.196,124.723
  text "CAN" at 232.802,143.806 h0.7
  text "LED" at 228.715,142.93 h0.7
  text "L" at 230.807,142.918 h0.7
  text "H" at 233.383,142.931 h0.7
  text "PWM6" at 226.434,138.882 h0.7
  text "/PPM" at 226.395,137.98 h0.7
  text "PWM5" at 226.552,135.939 h0.7
  text "TX" at 225.738,132.997 h0.7 r270
  text "UART3" at 220.138,130.711 h0.7 r270
  text "UART2" at 221.296,130.711 h0.7 r270
  text "UART1" at 222.455,130.711 h0.7 r270
  text "RX" at 225.75,130.624 h0.7 r270
  text "F3FC" at 246.246,128.102 h3 r270
  text "XPLORER" at 250.317,127.362 h4 r270
  text "3.3V" at 228.934,123.154 h0.7
  text "I2C" at 228.11,119.932 h0.7 r270
  text "-" at 294.073,117.716 h0.7
  text "+" at 291.564,117.683 h0.7
  text "SDA" at 232.76,117.424 h0.7 r270
  text "SCLK" at 230.142,116.724 h0.7 r270
  text "RAW" at 294.099,116.638 h0.7
  text "RCE" at 250.317,115.513 h5 r270
Mechanical 1:
  drawing of 312 lines, arcs and shapes, not listed
Mechanical 3:
  lines w0.1: 232.249,159.409 ccw(c264.598,254.384) 271.391,154.281 ; 232.262,105.428 cw(c264.611,10.452) 271.403,110.556 ; 232.262,105.441 cw(c252.252,104.807) 271.404,110.568 ; 232.261,159.449 ccw(c252.251,160.082) 271.403,154.321 ; 290.645,122.407 290.645,122.415
Mechanical 13:
  lines w0.1: 229.61,161.077 229.611,161.075